# Altium PCB pcbdesign.PcbDoc
Units mm, origin at the board's own origin, x right, y up, seen from the top; angles counter-clockwise.
Board outline 46.35 x 52.7 mm, 2 copper layers (Top Layer, Bottom Layer); 16 components, 12 nets, 95 pads, 0 vias.
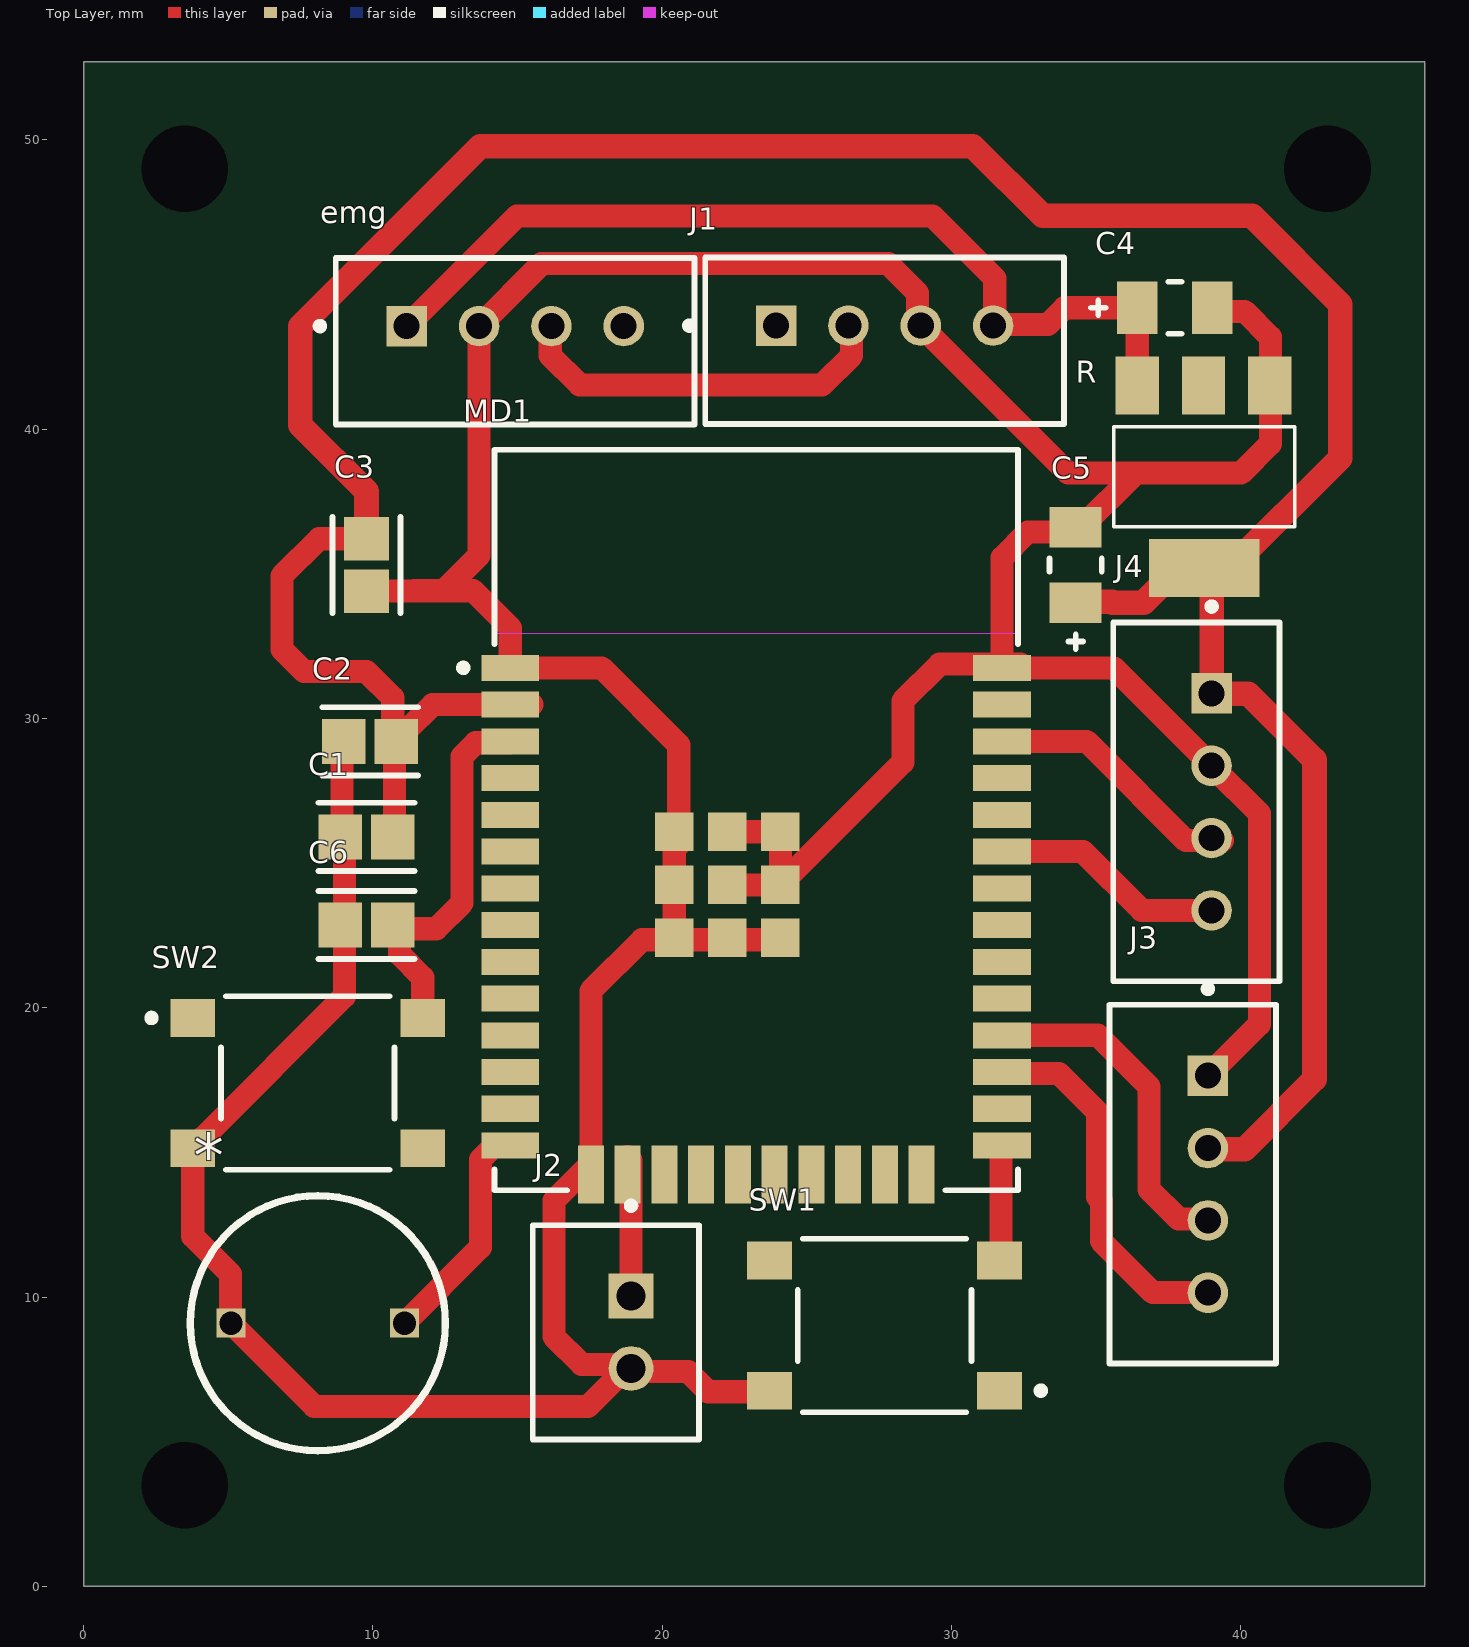
[diagram p0: Top Layer view]
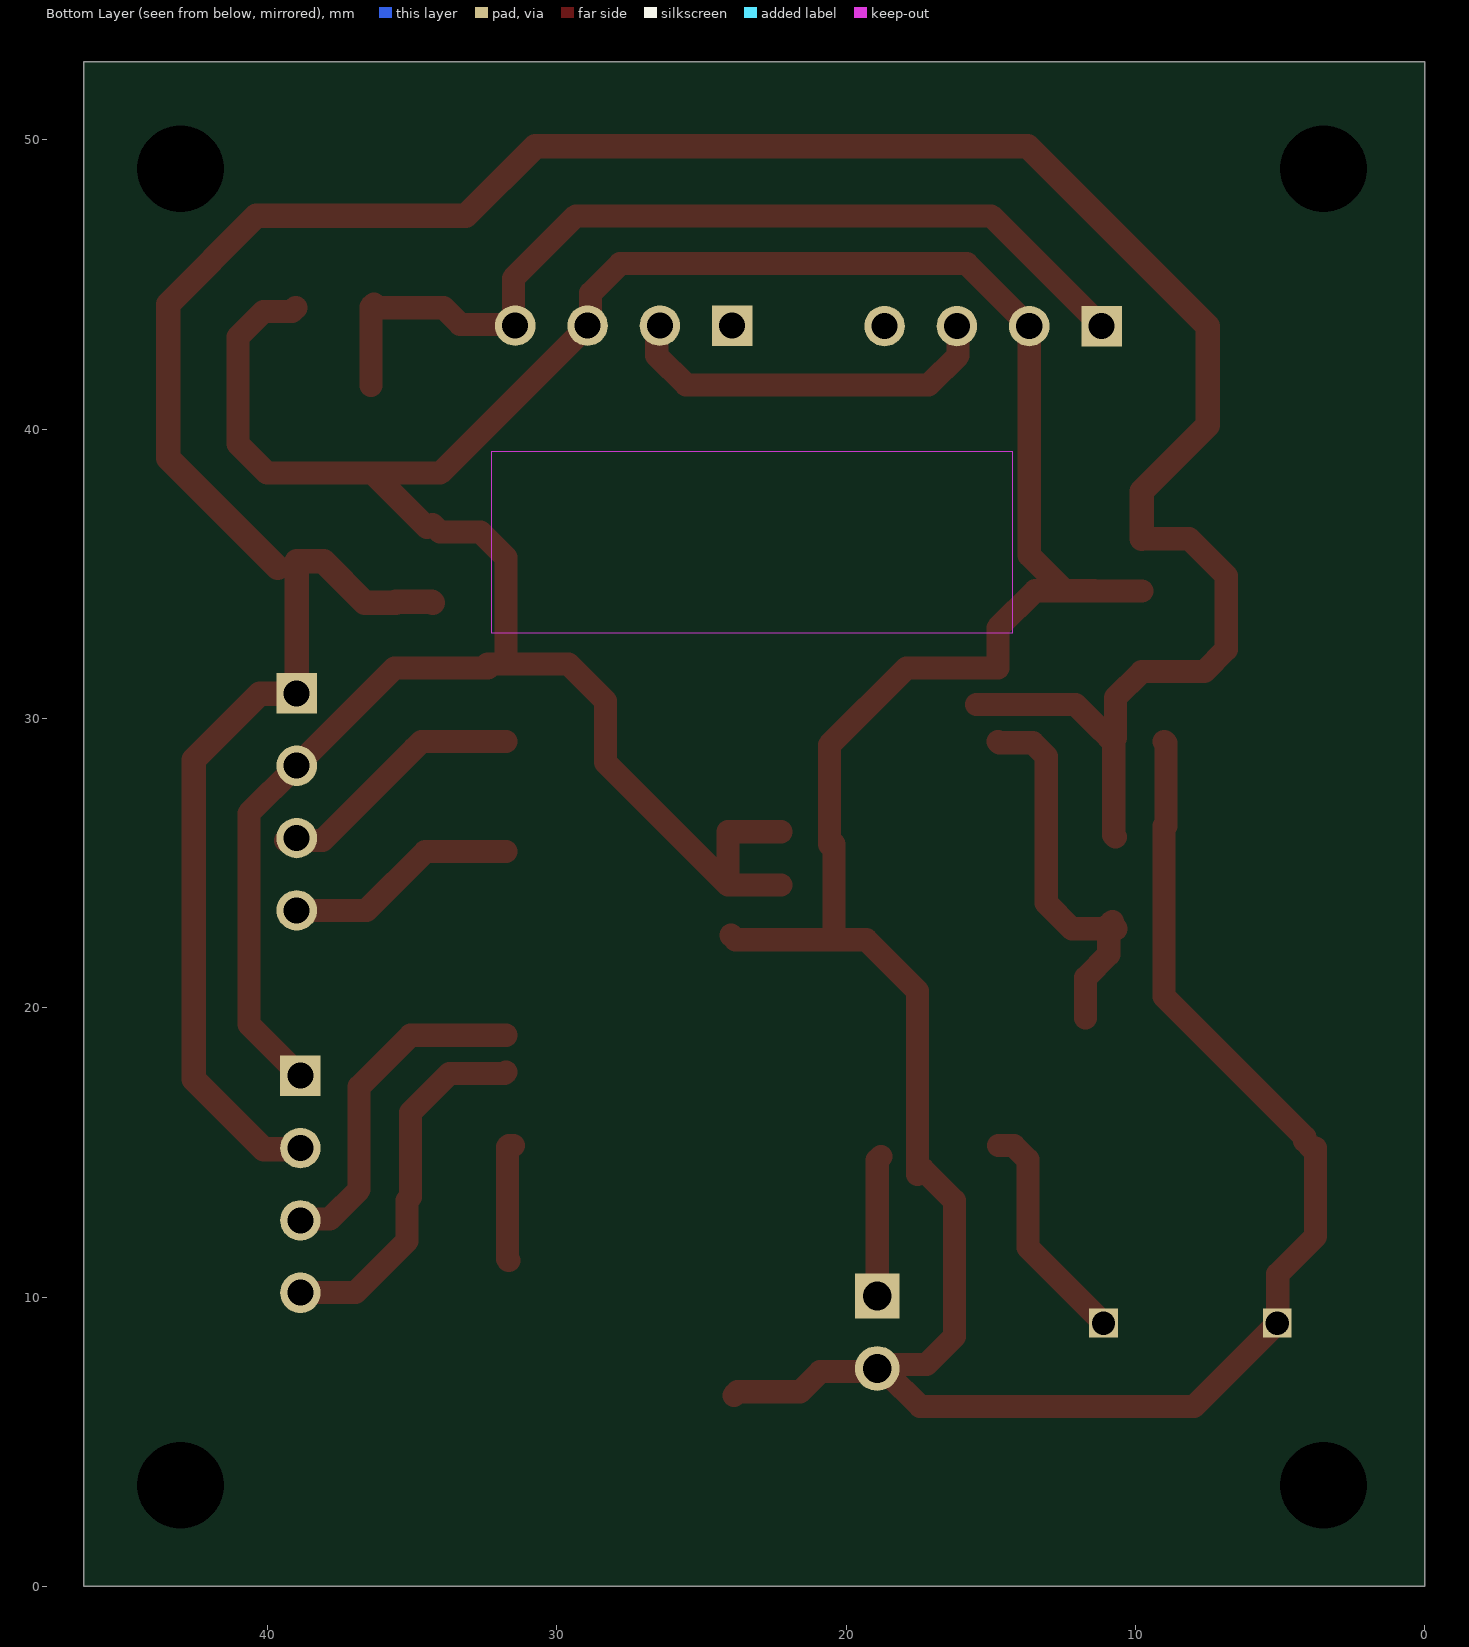
[diagram p1: Bottom Layer view, seen from below]
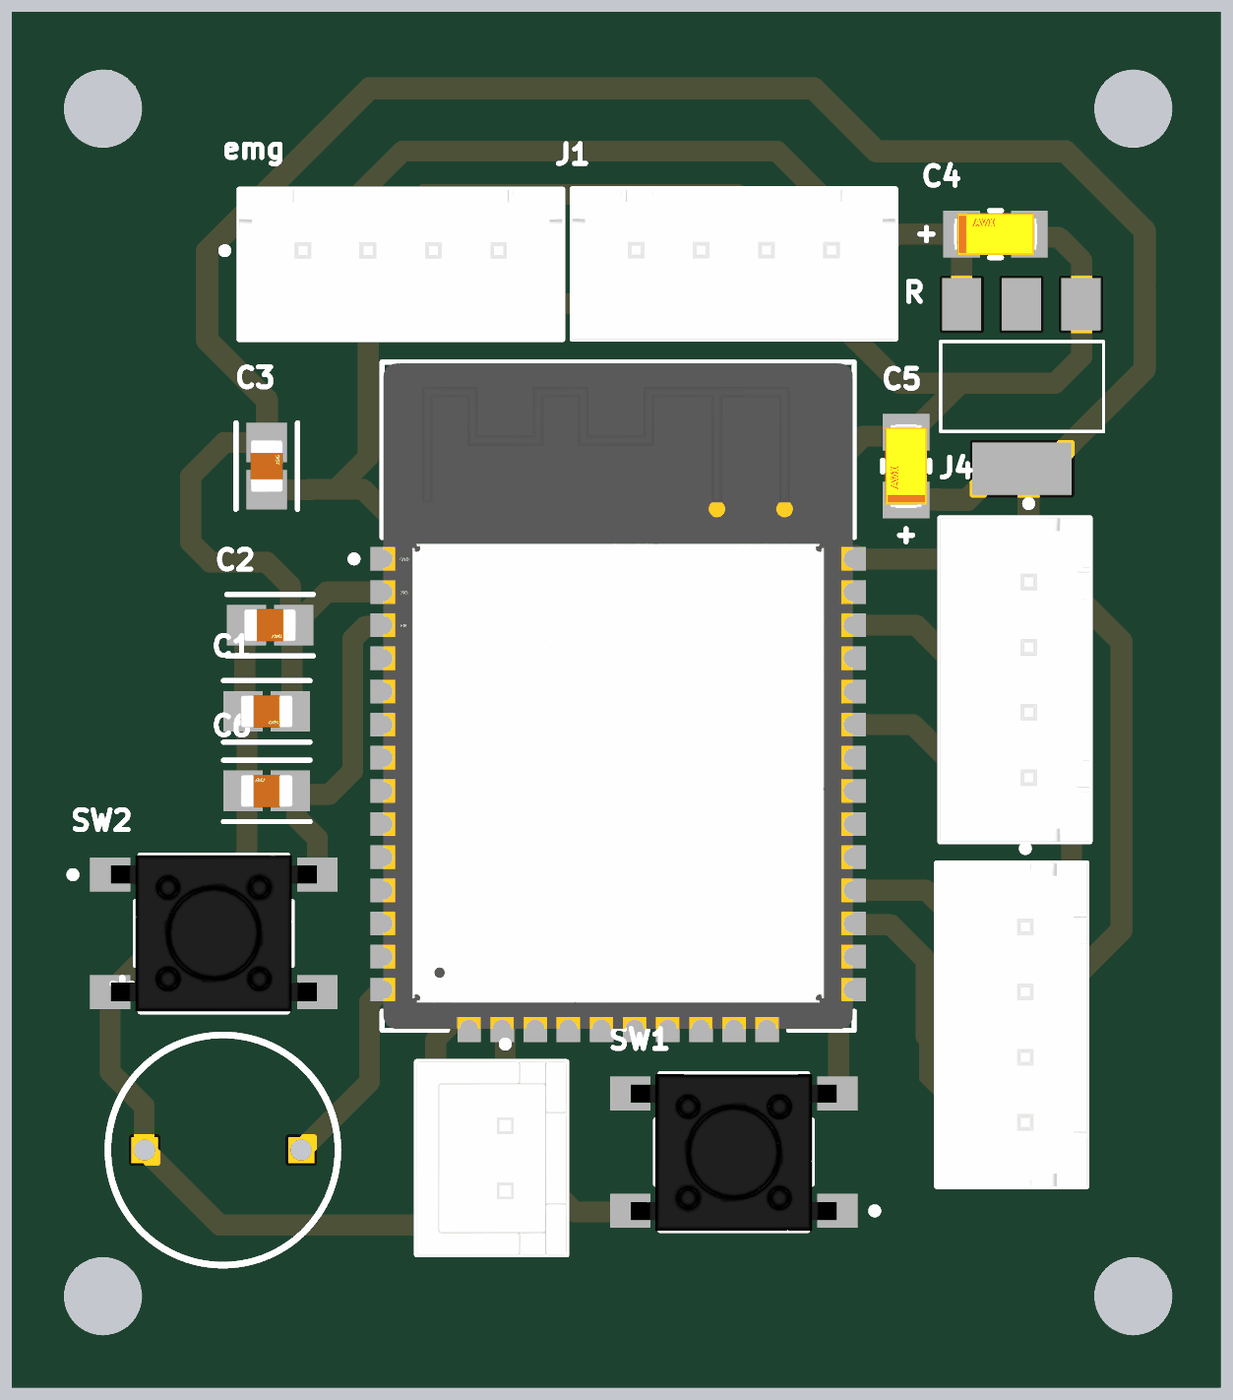
[diagram p2: 3D render of the assembled board from above, using the file's embedded part models]

## Layer stack, top to bottom
Top Solder: solder mask 0.0102, Solder Resist, Dk 3.5
Top Layer: signal copper 0.0356
Dielectric 1: dielectric 0.32, FR-4, Dk 4.8
Bottom Layer: signal copper 0.0356
Bottom Solder: solder mask 0.0102, Solder Resist, Dk 3.5

## Board outline
0,0 46.355,0 46.355,52.705 0,52.705

## Design rules (kind name [scope] priority, off if disabled: settings)
Clearance [All] p1 off: gap=0.85 ignorepadtopadclearanceinfootprint=FALSE ismatrix=TRUE
PolygonConnect [All] p1: connectstyle=Relief reliefconductorwidth=0.254 reliefentries=4 polygonreliefangle="90 Angle" airgapwidth=0.254
RoutingVias [All] p1: holewidth=0.711 width=1.27 viastyle="Through Hole" minholewidth=0.711 minwidth=1.27 maxholewidth=0.711 maxwidth=1.27
SolderMaskExpansion [All] p1: expansion=0.102 istentingtop=FALSE
SupplyNets "Schematic Supply Nets" [InNet('GND')] p1: voltage=0.000
Width [All] p1: maxlimit=0.8 minlimit=0.8 preferedwidth=0.8
30 further rules are at their usual default settings.

## Components (designator, comment, footprint, x,y, rotation, side; value= is the part's Value field where it differs from the comment)
* "BUZZER" BUZZER 11.049,9.144 r180 top
C1 "08053A4R7DAT2A" FP-0805-L_2_01_0_2-W_1_25-IPC_A 9.779,25.908 r0 top
C2 "08053A4R7DAT2A" FP-0805-L_2_01_0_2-W_1_25-IPC_A 9.906,29.21 r0 top
C3 "08053A4R7DAT2A" FP-0805-L_2_01_0_2-W_1_25-IPC_A 9.779,35.306 r90 top
C4 "TAJA106K016RNJ" FP-TAJA-MFG 37.719,44.196 r180 top
C5 "TAJA106K016RNJ" FP-TAJA-MFG 34.29,35.306 r270 top
C6 "08053A4R7DAT2A" FP-0805-L_2_01_0_2-W_1_25-IPC_A 9.779,22.86 r180 top
emg "" FP-B4B-XH-A_LF_SN-MFG 14.919,43.036 r180 top
J1 "B4B-XH-A(LF)(SN)" FP-B4B-XH-A_LF_SN-MFG 27.686,43.053 r180 top
J2 "B2B-XH-A(LF)(SN)" FP-B2B-XH-A_LF_SN-MFG 18.398,8.783 r270 top
J3 "B4B-XH-A(LF)(SN)" FP-B4B-XH-A_LF_SN-MFG 38.337,13.903 r90 top
J4 "B4B-XH-A(LF)(SN)" FP-B4B-XH-A_LF_SN-MFG 38.464,27.118 r90 top
MD1 "ESP32-WROOM-32" FP-ESP32-WROOM-32-MFG 23.25,26.49 r0 top
R "LM1117-3.3" SOT-223 38.735,38.354 r180 top
SW1 "" FP-PTS645SM43SMTR92LFS-MFG 27.686,9.017 r180 top
SW2 "" FP-PTS645SM43SMTR92LFS-MFG 7.747,17.399 r0 top

## Footprints (in the part's own frame and the unit in brackets; to place one, negate y for a bottom-side part, rotate by r counter-clockwise, add the part's x,y. Pads: shape width x height; smd on the part's side, far side on the other; paste and mask are expansions set on the pad)
BUZZER [mm]
  rect 1x1 hole 0.8: 1(-0.049,0.046) 2(5.951,0.046)
  silkscreen extent -1.46,-4.36 7.36,4.45
FP-0805-L_2_01_0_2-W_1_25-IPC_A [mm]
  rect 1.505x1.556 smd paste+0 mask+0: 1(-0.906,0) 2(0.906,0)
  silkscreen extent -1.66,-1.18 1.66,1.18, body extent -2.16,-1.28 2.16,1.28, height 0.25
FP-B2B-XH-A_LF_SN-MFG [mm]
  rect 1.55x1.55 hole 1 paste-2539.97 mask+0: 1(-1.25,0.525)
  round 1.55 hole 1 paste-2539.97 mask+0: 2(1.25,0.525)
  silkscreen extent -4.5,-2.87 3.7,2.88, body extent -3.8,-2.98 3.8,2.98, height 0.25
FP-B4B-XH-A_LF_SN-MFG [mm]
  rect 1.4x1.4 hole 0.9 paste-2539.97 mask+0: 1(3.75,-0.525)
  round 1.4 hole 0.9 paste-2539.97 mask+0: 2(1.25,-0.525) 3(-1.25,-0.525) 4(-3.75,-0.525)
  silkscreen extent -6.2,-2.88 6.87,2.87, body extent -6.3,-2.98 6.3,2.98, height 0.25
FP-ESP32-WROOM-32-MFG [mm]
  rect 2x0.9 smd paste+0 mask+0: 1(-8.5,5.26) 2(-8.5,3.99) 3(-8.5,2.72) 4(-8.5,1.45) 5(-8.5,0.18) 6(-8.5,-1.09) 7(-8.5,-2.36) 8(-8.5,-3.63) 9(-8.5,-4.9) 10(-8.5,-6.17) 11(-8.5,-7.44) 12(-8.5,-8.71) 13(-8.5,-9.98) 14(-8.5,-11.25) 25(8.5,-11.25) 26(8.5,-9.98) 27(8.5,-8.71) 28(8.5,-7.44) 29(8.5,-6.17) 30(8.5,-4.9) 31(8.5,-3.63) 32(8.5,-2.36) 33(8.5,-1.09) 34(8.5,0.18) 35(8.5,1.45) 36(8.5,2.72) 37(8.5,3.99) 38(8.5,5.26)
  rect 0.9x2 smd paste+0 mask+0: 15(-5.715,-12.25) 16(-4.445,-12.25) 17(-3.175,-12.25) 18(-1.905,-12.25) 19(-0.635,-12.25) 20(0.635,-12.25) 21(1.905,-12.25) 22(3.175,-12.25) 23(4.445,-12.25) 24(5.715,-12.25)
  rect 1.33x1.33 smd paste+0 mask+0: 39(-2.835,-4.075) 39(-2.835,-2.24) 39(-2.835,-0.405) 39(-1,-4.075) 39(-1,-2.24) 39(-1,-0.405) 39(0.835,-4.075) 39(0.835,-2.24) 39(0.835,-0.405)
  Keep-Out Layer region: -9,6.45 9,6.45 9,12.75 -9,12.75
  Keep-Out Layer region: -9,6.45 9,6.45 9,12.75 -9,12.75
  silkscreen extent -10.25,-12.8 9.05,12.8, body extent -9.6,-13.35 9.6,12.9, height 0.25
FP-PTS645SM43SMTR92LFS-MFG [mm]
  rect 1.55x1.3 smd paste+0 mask+0: 1(-3.975,2.25) 2(3.975,2.25) 3(-3.975,-2.25) 4(3.975,-2.25)
  silkscreen extent -5.53,-3 3,3, body extent -4.85,-3.1 4.85,3.1, height 0.25
FP-TAJA-MFG [mm]
  rect 1.4x1.8 smd paste+0 mask+0: 1(-1.3,0) 2(1.3,0)
  silkscreen extent -0.22,-0.9 2.9,0.9, body extent -2.1,-1 2.1,1, height 0.25
SOT-223 [mil]
  rect 59x79 smd: 1(-89,-124) 2(1,-124) 3(91,-124)
  rect 150x79 smd: 4(0,124)
  silkscreen extent -123,-68 123,68

## Part data
C1 C2 C3 C6: library part CMP-04427-001632-1, "General Purpose Ceramic Capacitor, 0805, 4.7pF, 0.5pF, C0G, 30ppm/°C, 25V", Capacitance=4.7pF, Case Code (Imperial)=0805, Case Code (Metric)=2012, Dielectric=C0G, Max Operating Temperature=125°C, Min Operating Temperature=-55°C, Package Quantity=4000, Voltage Rating=25V, Case/Package=0805, Construction=Flat, Depth=1.25mm, Length=2.01mm, Mount="Surface Mount", Packaging="Tape and Reel", Radiation Hardening=No, RoHS Compliant=Yes, Termination=SMD/SMT, Thickness=0.037inch, Voltage Rating (DC)=25V, Weight=0.000194oz, Width=0.049inch
C4 C5: library part CMP-1661-00004-2, "10uF 16V  ±10% 3Ω 1206  SMD Tantalum Capacitor", Capacitance=10uF, Case Code (Imperial)=1206, Case Code (Metric)=3216, Dielectric Material=Tantalum, ESR (Equivalent Series Resistance)=3R, Leakage Current=1.6uA, Max Operating Temperature=125°C, Min Operating Temperature=-55°C, Package Quantity=1, Tolerance=10%, Voltage=16V, Case/Package=1206, Depth=1.6mm, Dissipation Factor=8%, Features="General Purpose", Height=1.6mm, Height - Seated (Max)=0.071inch, Lead Free="Lead Free", Lead Pitch=1.1mm, Length=3.2mm, Mount="Surface Mount", Number of Pins=2, Packaging="Tape and Reel", Polarity=Polar, Radiation Hardening=No, REACH SVHC="No SVHC", Termination=SMD/SMT, Voltage Rating=16V, Voltage Rating (DC)=16V, Width=1.6mm
emg J1 J3 J4: library part CMP-17439-000250-1, "CONN HEADER VERT 4POS 2.5MM", Color=Natural, Contact Resistance=20mR, Current Rating=3A, Flammability Rating="UL94 V-0", Housing Color=White, Insulation Resistance=1GR, Max Operating Temperature=85°C, Max Voltage Rating (AC)=250V, Min Operating Temperature=-25°C, Package Quantity=500, Connector Type=Header, Contact Finish - Mating=TIN, Contact Material=Brass, Contact Plating=Tin, Contact Shape=Square, Contact Type="Male Pin", Depth=5.75mm, Fastening Type=Detent, Gender=Male, Housing Material=Polyamide, Insulation Color=Natural, Insulation Material=Nylon, Lead Free="Lead Free", Lead Pitch=2.5mm, Length=12.4mm, Mated Stacking Heights=9.8mm, Material=Polyamide, Max Current Rating=3A, Max Voltage Rating (DC)=250V, Mount="Through Hole", Number Of Contacts=4, Number of Positions=4, Number Of Rows=1, Orientation=Straight, Packaging=Bulk, Pitch=2.5mm, REACH SVHC="No SVHC", Series=XH, Termination=Solder, Voltage Rating=250V, Voltage Rating (AC)=250V, Wire/Cable Gauge=22AWG
J2: library part CMP-2000-05888-3, "CONN HEADER VERT 2POS 2.5MM", Color=Natural, Contact Resistance=20mR, Current Rating=3A, Housing Color=White, Insulation Resistance=1GR, Max Operating Temperature=85°C, Max Voltage Rating (AC)=250V, Min Operating Temperature=-25°C, Connector Type="Male Pin", Contact Material=Brass, Contact Plating=Tin, Contact Type="Male Pin", Depth=5.75mm, Fastening Type=Detent, Housing Material=Polyamide, Lead Free="Lead Free", Lead Pitch=2.5mm, Length=7.4mm, Max Current Rating=3A, Max Voltage Rating (DC)=250V, Mount="Through Hole", Number Of Contacts=2, Number of Positions=2, Number Of Rows=1, Orientation=Straight, Packaging=Bulk, Pitch=2.5mm, REACH SVHC="No SVHC", Series=XH, Termination=Solder, Voltage Rating=250V, Voltage Rating (AC)=250V, Wire/Cable Gauge=22AWG
MD1: library part CMP-194065-000008-1, "RX TXRX MOD WIFI SURFACE MOUNT", Case/Package=SMD/SMT, Frequency=2.5GHz, Max Operating Temperature=85°C, Min Operating Temperature=-40°C, Operating Supply Voltage=3.6V, Package Quantity=550, Data Rate=150Mbps, Mount="Surface Mount", Packaging="Cut Tape", Sensitivity=-98dBm, Weight=0.088185oz
R: library part CMP-027-000000-1, "Linear Voltage Regulator IC 1 Output 800mA SOT-223-4", Package="SOT-223-4 Texas Instruments", Availability=Unavailable, Component Type=Standard, Design Item ID=LM1117-3.3, MF="Texas Instruments", MP=LM1117-3.3, Pin Count=4, Price=None, SnapEDA_Link=https://www.snapeda.com/parts/LM1117-3.3/Texas%20Instruments/view-part/549181/?ref=snap, Source=SnapEDAsch.SchLib
SW1 SW2: library part CMP-2000-05160-2, "SWITCH TACTILE SPST-NO 0.05A 12V", Case/Package=SMD/SMT, Color=Black, Contact Resistance=100mR, Current Rating=50mA, Max Operating Temperature=60°C, Max Voltage Rating (DC)=12V, Min Operating Temperature=-20°C, Operating Force=160gf, Package Quantity=1, Actuator Length=0.85mm, Actuator Material=Nylon, Actuator Type=Standard, Contact Material=Silver, Contact Plating=Silver, Depth=9mm, Illumination Type=Non-Illuminated, Lead Free="Lead Free", Length=6mm, Max Current Rating=50mA, Mechanical Life=100000Cycles, Mount="Surface Mount", Orientation=Straight, Packaging="Tape and Reel", REACH SVHC="No SVHC", Switch Function=Off-Mom, Termination="Gull Wing", Throw Configuration=SPST, Voltage Rating (DC)=12V

## Free pads (board coordinates)
  round 0 hole 3 unplated: 2(3.5,49) 3(3.5,3.5) 3(43,49) 4(43,3.5)

## Nets (pads, with @x,y where several pads share a name; then routed paths per layer and width w, separated by ;. In a path a pad name is that pad's centre, name@x,y a point inside that pad or via, vN(x,y) a via of type N, cw(c..) or ccw(c..) an arc to the next point about the centre after c; other vN are vias at no path point)
3V3: C1.2 C2.2 C3.2 C5.2 J3.2 J4.1 MD1.2 R.4 | length 110.7
  Top Layer w0.8: C3.2 8.145,36.212 6.858,34.925 6.858,32.385 7.62,31.623 9.779,31.623 10.688,30.714 C2.2@10.688,29.334 ; C1.2 10.748,25.972 10.748,29.163 C2.2@10.795,29.21 ; C2.2@10.803,29.218 C2.2@10.922,29.337 ; C2.2 C2.2@10.795,29.21 ; MD1.2@15.494,30.48 MD1.2 12.065,30.48 11.173,29.588 11.164,29.588 10.795,29.219 C2.2@10.795,29.21
  Top Layer w0.85: C3.2 9.779,37.846 7.493,40.132 7.493,43.561 13.716,49.784 30.734,49.784 33.147,47.371 40.386,47.371 43.434,44.323 43.434,39.002 R.4@39.637,35.204 ; C5.2 34.32,34.036 35.56,34.036 ; 35.56,34.006 36.635,34.006 38.062,35.433 38.989,35.433 J4.1 ; J3.2 38.902,15.113 40.132,15.113 42.545,17.526 42.545,28.575 40.259,30.861 J4.1@38.862,30.861
+6: C4.2 emg.1 J1.4 R.3 | length 32.7
  Top Layer w0.8: emg.1 11.176,43.561 11.176,43.568 11.469,43.861 11.476,43.861 14.986,47.371 29.337,47.371 31.496,45.212 J1.4@31.496,43.623 ; J1.4 31.481,43.623 J1.4@31.496,43.623 ; J1.4@31.496,43.434 J1.4@31.496,43.623 ; C4.2@36.322,44.323 36.421,44.224 C4.2@36.421,44.196 ; R.3 36.421,41.506 C4.2@36.421,44.196 ; J1.4@31.496,43.623 33.336,43.623 33.909,44.196 C4.2 C4.2@36.421,44.196
-6: emg.3 J1.2 | length 13.5
  Top Layer w0.8: emg.3 16.129,43.521 16.129,42.545 17.145,41.529 25.527,41.529 26.543,42.545 26.543,43.561 J1.2@26.416,43.688
GND: *.2 C1.1 C2.1 C3.1 C4.1 C5.1 C6.2 emg.2 J1.3 J2.2 J3.1 J4.2 MD1.1 MD1.15 MD1.38 MD1.39 R.1 SW1.2 SW2.3 | length 181.9
  Top Layer w0.8: SW2.3@3.772,15.024 3.772,12.103 5.08,10.795 *.2@5.08,9.144 ; SW2.3 3.897,15.149 4.147,15.399 4.147,15.524 9.017,20.394 C1.1@9.017,26.289 ; *.2 7.973,6.223 17.44,6.223 J2.2@18.592,7.375 ; C1.1@8.937,26.289 8.937,29.146 C2.1 ; C3.1 11.43,34.4 ; 11.43,34.417 12.446,34.417 ; MD1.15@17.348,14.427 16.256,13.335 16.256,8.636 17.215,7.677 J2.2@18.779,7.677 ; MD1.15 17.535,20.583 19.304,22.352 23.82,22.352 MD1.39@23.975,22.507 ; J2.2@19.05,7.423 20.898,7.423 21.59,6.731 23.749,6.731 SW1.2@23.876,6.604 ; MD1.39@20.415,22.415 20.415,24.25 MD1.39@20.415,25.654 ; MD1.39@20.574,25.654 20.574,29.083 17.907,31.75 MD1.1 14.75,33.129 13.462,34.417 12.446,34.417 ; MD1.39@22.25,24.25 MD1.39@24.085,24.25 ; MD1.39@22.25,26.085 24.085,26.085 MD1.39@24.085,24.25 ; J1.3@28.829,43.688 28.829,44.704 27.813,45.72 15.828,45.72 emg.2 13.669,35.64 12.446,34.417 ; J1.3 34.033,38.481 36.365,38.481 ; MD1.38@32.385,31.75 35.607,31.75 J4.2 38.989,28.321 39.036,28.321 40.64,26.717 40.64,19.431 J3.1 ; MD1.38@32.385,31.877 MD1.38@31.75,31.877 ; C5.1@34.29,36.703 34.036,36.449 32.639,36.449 31.75,35.56 MD1.38@31.75,31.877 ; C5.1@34.49,36.606 36.365,38.481 ; C4.1 39.146,44.069 40.132,44.069 41.021,43.18 41.021,39.497 40.005,38.481 36.365,38.481 ; MD1.39@24.085,24.25 28.321,28.486 28.321,30.607 29.591,31.877 MD1.38@31.75,31.877
Net*_1: *.1 MD1.14 | length 8
  Top Layer w0.8: *.1 13.716,11.716 13.716,14.756 14.2,15.24 MD1.14@14.732,15.24
NetC6_1: C6.1 MD1.3 SW2.2 | length 13.5
  Top Layer w0.8: C6.1@10.668,22.733 C6.1@10.922,22.733 ; C6.1@10.795,22.987 10.922,22.86 C6.1@10.922,22.733 ; SW2.2 11.722,21.044 10.922,21.844 C6.1@10.922,22.733 ; MD1.3 14.7,29.16 13.55,29.16 13.081,28.691 13.081,23.622 12.192,22.733 C6.1@10.922,22.733
NetMD1_25: MD1.25 SW1.3 | length 4.2
  Top Layer w0.8: MD1.25@31.496,15.24 31.655,15.24 31.705,15.19 31.705,11.311 SW1.3
RX: J3.4 MD1.27 | length 12.9
  Top Layer w0.8: MD1.27 31.8,17.73 33.705,17.73 35.052,16.383 35.052,13.462 35.179,13.335 35.179,11.938 36.962,10.155 38.984,10.155 J3.4@38.989,10.16
SCL: J4.3 MD1.36 | length 9
  Top Layer w0.8: MD1.36 34.671,29.21 34.925,28.956 38.1,25.781 J4.3@39.37,25.781
SDA: J4.4 MD1.33 | length 8.1
  Top Layer w0.8: MD1.33 34.544,25.4 36.576,23.368 38.862,23.368 J4.4@38.989,23.495
signal: J2.1 MD1.16 | length 4.9
  Top Layer w0.8: MD1.16@18.796,14.859 18.923,14.732 J2.1
TX: J3.3 MD1.28 | length 12
  Top Layer w0.8: MD1.28 35.052,19.05 36.83,17.272 36.83,13.716 37.846,12.7 J3.3@38.989,12.7
pads on no net: emg.4 J1.1 MD1.4 MD1.5 MD1.6 MD1.7 MD1.8 MD1.9 MD1.10 MD1.11 MD1.12 MD1.13 MD1.17 MD1.18 MD1.19 MD1.20 MD1.21 MD1.22 MD1.23 MD1.24 MD1.26 MD1.29 MD1.30 MD1.31 MD1.32 MD1.34 MD1.35 MD1.37 R.2 SW1.1 SW1.4 SW2.1 SW2.4